# EAGLE board STM32F446RE_subcircuitpre (EAGLE 8.6.3)
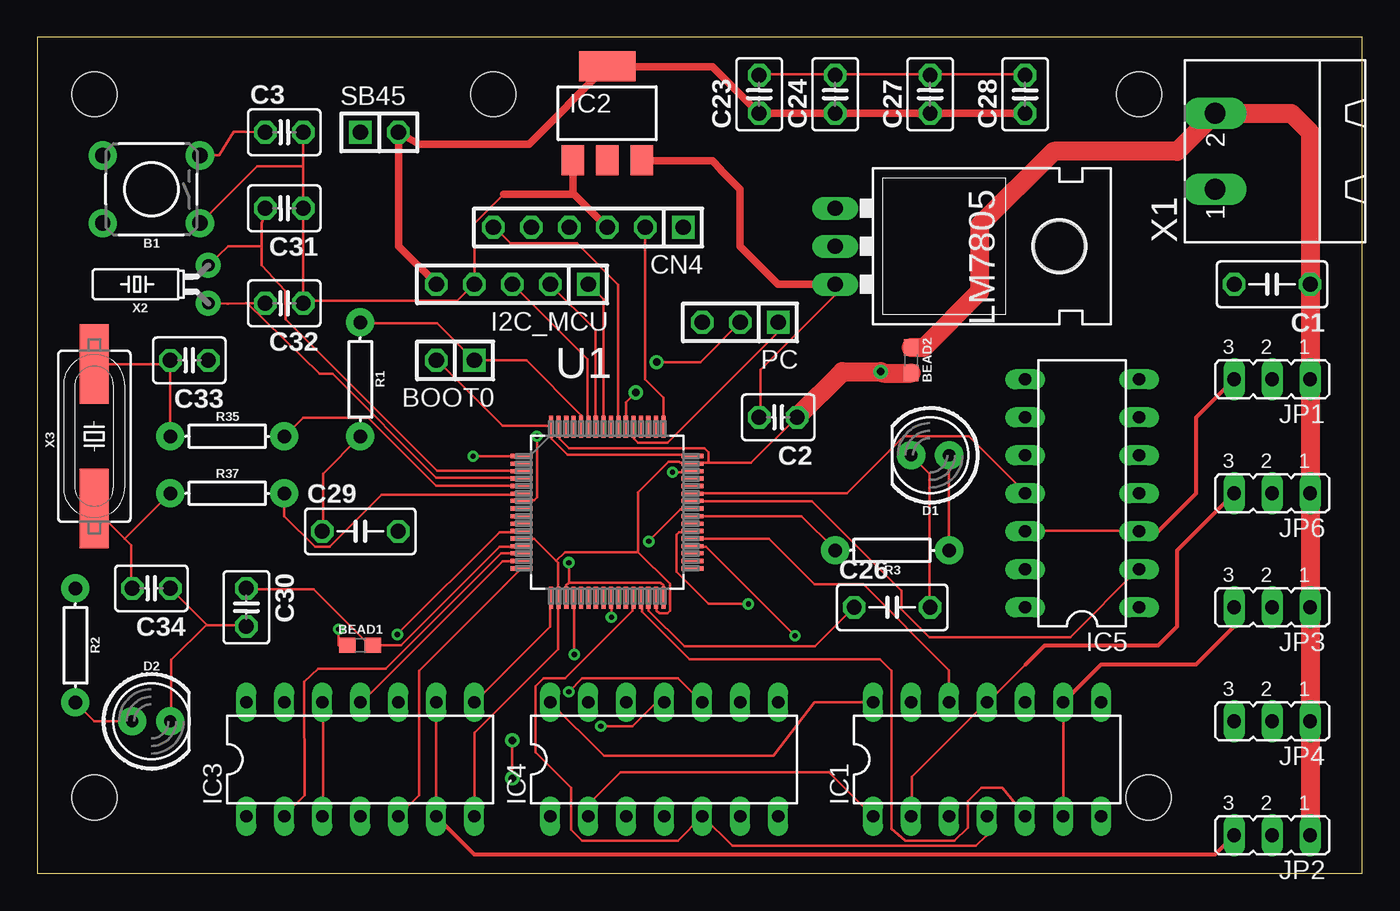
[diagram p0: board, top side]
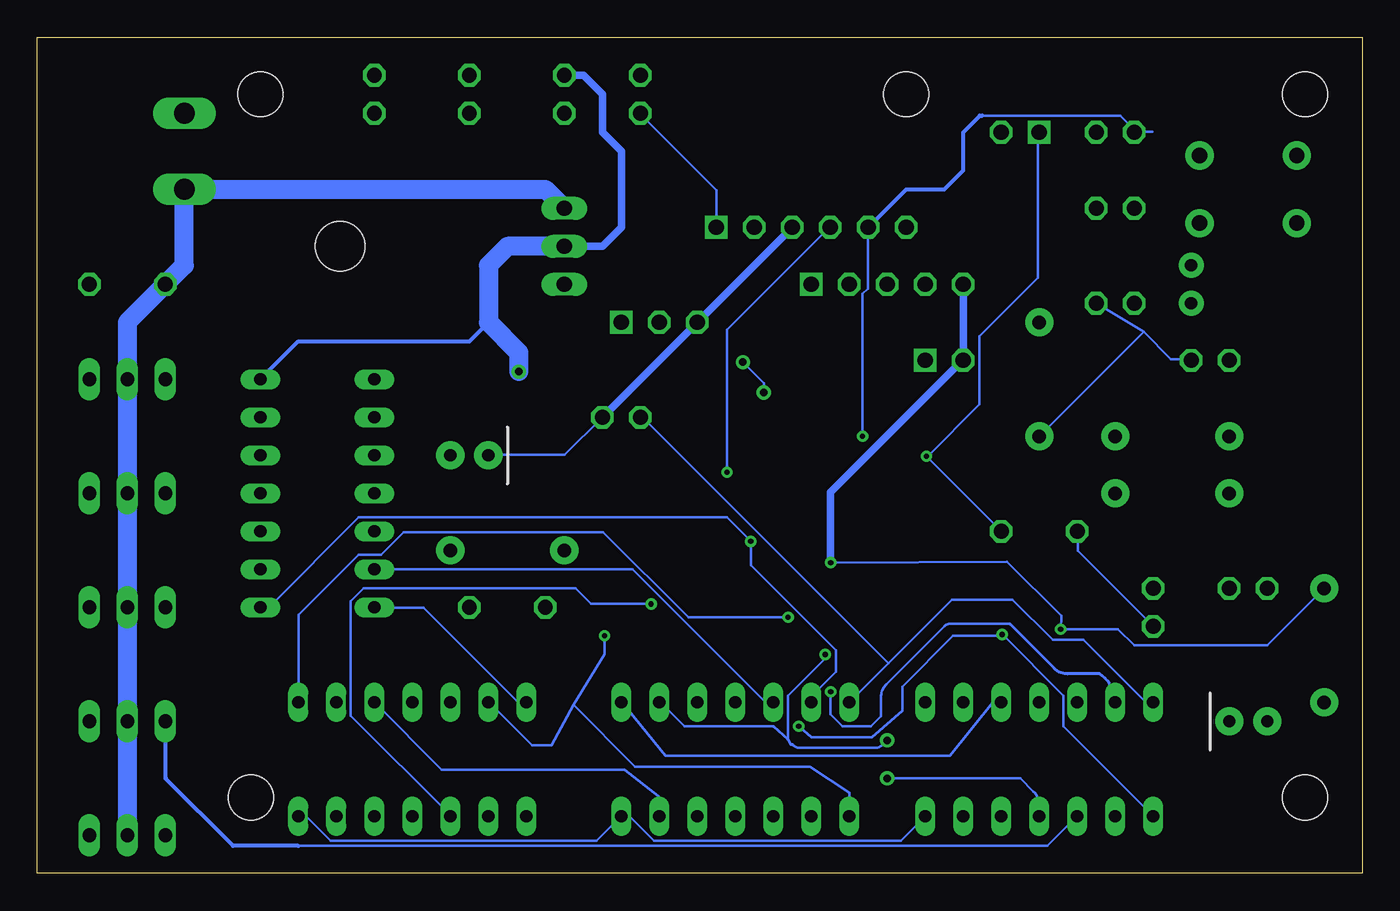
[diagram p1: board, bottom side, seen from below]

Size 88.57 x 55.87 mm. Coordinates in mm from the lower left corner, seen from the top.
Outline: 0,0 88.57,0 88.57,55.87 0,55.87 0,0
Copper layers (1*16): Top 0.035mm / dielectric 1.5mm / Bottom 0.035mm
Design rules "default *": minimum track width 7mil, minimum drill 0.35mm, track to track 7mil, track to pad 7mil, pad to pad 7mil, via to via 7mil, smd to smd 7mil, copper to edge 40mil, drill to drill 6mil, minimum pad ring 10mil, minimum via ring 8mil, stop-mask expansion 4mil, vias tented up to drill 0mil, thermal gap 10mil
Net classes: 0 default: width 0.178 mm, drill 0.178 mm, clearance 0.178 mm; 1 servo: width 0.254 mm, drill 0.254 mm, clearance 0.254 mm
Holes 3 mm at 74.3,5.08 3.81,5.08 3.81,52.07 73.66,52.07 30.48,52.07

## Footprints (pad centres in the part's own frame; a part is rotated, then mirrored left to right if it is on the bottom)
TACTILE_SWITCH_PTH_6.0MM = drill 1.016 pad 1.88: 1 -3.251,2.261; 2 3.251,2.261; 3 -3.251,-2.261; 4 3.251,-2.261
0603 = smd 1.1 x 1: 1 -0.85,0; 2 0.85,0
1X02 = drill 1.016 square: 1 -1.27,0 | drill 1.016 octagon: 2 1.27,0
C050-030-075 = drill 1 octagon: 1 -2.54,0; 2 2.54,0
C025-030X050 = drill 1 octagon: 1 -1.27,0; 2 1.27,0
1X06 = drill 1.016 square: 1 -6.35,0 | drill 1.016 octagon: 2 -3.81,0; 3 -1.27,0; 4 1.27,0; 5 3.81,0; 6 6.35,0
LED_5MM = drill 0.813 pad 1.88: A -1.27,0; K 1.27,0
1X05 = drill 1.016 square: 1 -5.08,0 | drill 1.016 octagon: 2 -2.54,0; 3 0,0; 4 2.54,0; 5 5.08,0
DIL14 = drill 0.813 long: 1 -7.62,-3.81; 2 -5.08,-3.81; 3 -2.54,-3.81; 4 0,-3.81; 5 2.54,-3.81; 6 5.08,-3.81; 7 7.62,-3.81; 8 7.62,3.81; 9 5.08,3.81; 10 2.54,3.81; 11 0,3.81; 12 -2.54,3.81; 13 -5.08,3.81; 14 -7.62,3.81
SOT223 = smd 1.5 x 2: 1 -2.3,-3.15; 2 0,-3.15; 3 2.3,-3.15 | smd 3.8 x 2: 4 0,3.15
JP2 = drill 0.914 long: 1 -2.54,0; 2 0,0; 3 2.54,0
TO-220-ALT = drill 1.016 long: GND 0,-3.81; IN -2.54,-3.81; OUT 2.54,-3.81 | hole 3.302: 0,11.176
1X03 = drill 1.016 square: 1 -2.54,0 | drill 1.016 octagon: 2 0,0; 3 2.54,0
AXIAL-0.3 = drill 0.9 pad 1.88: P$1 -3.81,0; P$2 3.81,0
QFP50P1200X1200X160-64N = smd 1.473 x 0.279: 1 -5.715,3.759; 2 -5.715,3.251; 3 -5.715,2.743; 4 -5.715,2.261; 5 -5.715,1.753; 6 -5.715,1.245; 7 -5.715,0.762; 8 -5.715,0.254; 9 -5.715,-0.254; 10 -5.715,-0.762; 11 -5.715,-1.245; 12 -5.715,-1.753; 13 -5.715,-2.261; 14 -5.715,-2.743; 15 -5.715,-3.251; 16 -5.715,-3.759; 33 5.715,-3.759; 34 5.715,-3.251; 35 5.715,-2.743; 36 5.715,-2.261; 37 5.715,-1.753; 38 5.715,-1.245; 39 5.715,-0.762; 40 5.715,-0.254; 41 5.715,0.254; 42 5.715,0.762; 43 5.715,1.245; 44 5.715,1.753; 45 5.715,2.261; 46 5.715,2.743; 47 5.715,3.251; 48 5.715,3.759 | smd 0.279 x 1.473: 17 -3.759,-5.715; 18 -3.251,-5.715; 19 -2.743,-5.715; 20 -2.261,-5.715; 21 -1.753,-5.715; 22 -1.245,-5.715; 23 -0.762,-5.715; 24 -0.254,-5.715; 25 0.254,-5.715; 26 0.762,-5.715; 27 1.245,-5.715; 28 1.753,-5.715; 29 2.261,-5.715; 30 2.743,-5.715; 31 3.251,-5.715; 32 3.759,-5.715; 49 3.759,5.715; 50 3.251,5.715; 51 2.743,5.715; 52 2.261,5.715; 53 1.753,5.715; 54 1.245,5.715; 55 0.762,5.715; 56 0.254,5.715; 57 -0.254,5.715; 58 -0.762,5.715; 59 -1.245,5.715; 60 -1.753,5.715; 61 -2.261,5.715; 62 -2.743,5.715; 63 -3.251,5.715; 64 -3.759,5.715
MSTBA2 = drill 1.397 long: 1 -2.54,5.08; 2 2.54,5.08
CRYSTAL-PTH-2X6-CYL = drill 0.813 pad 1.676: 1 -1.27,0; 2 1.27,0
HC49UP = smd 5.334 x 1.93: 1 -4.826,0; 2 4.826,0

## Placement (x,y rotation side)
B1  6MM(momentary)  [TACTILE_SWITCH_PTH_6.0MM]  7.62,45.72 180 top
BEAD1  30Ω/1.8A  [0603]  21.59,15.24 0 top
BEAD2  30Ω/1.8A  [0603]  58.42,34.29 270 top
BOOT0  [1X02]  27.94,34.29 180 top
C1  1uF  [C050-030-075]  82.55,39.37 180 top
C2  100nF  [C025-030X050]  49.53,30.48 180 top
C3  100nF  [C025-030X050]  16.51,49.53 0 top
C23  100nF  [C025-030X050]  48.26,52.07 90 top
C24  100nF  [C025-030X050]  53.34,52.07 90 top
C26  4.7uF  [C050-030-075]  57.15,17.78 0 top
C27  100nF  [C025-030X050]  59.69,52.07 90 top
C28  100nF  [C025-030X050]  66.04,52.07 90 top
C29  1uF  [C050-030-075]  21.59,22.86 0 top
C30  100nF  [C025-030X050]  13.97,17.78 270 top
C31  4.3pF  [C025-030X050]  16.51,44.45 180 top
C32  4.3pF  [C025-030X050]  16.51,38.1 180 top
C33  20pF  [C025-030X050]  10.16,34.29 180 top
C34  20pF  [C025-030X050]  7.62,19.05 180 top
CN4  [1X06]  36.83,43.18 180 top
D1  [LED_5MM]  59.69,27.94 180 top
D2  [LED_5MM]  7.62,10.16 0 top
I2C_MCU  [1X05]  31.75,39.37 180 top
IC1  74AC126N  [DIL14]  63.5,7.62 0 top
IC2  LD117AS33TR  [SOT223]  38.1,50.8 0 top
IC3  74AC126N  [DIL14]  21.59,7.62 0 top
IC4  74HC04N  [DIL14]  41.91,7.62 0 top
IC5  74AC126N  [DIL14]  69.85,25.4 90 top
JP1  [JP2]  82.55,33.02 180 top
JP2  [JP2]  82.55,2.54 180 top
JP3  [JP2]  82.55,17.78 180 top
JP4  [JP2]  82.55,10.16 180 top
JP6  [JP2]  82.55,25.4 180 top
LM7805  [TO-220-ALT]  57.15,41.91 270 top
PC  [1X03]  46.99,36.83 180 top
R1  10k  [AXIAL-0.3]  21.59,33.02 270 top
R2  1k  [AXIAL-0.3]  2.54,15.24 270 top
R3  1k  [AXIAL-0.3]  57.15,21.59 180 top
R35  1k  [AXIAL-0.3]  12.7,29.21 0 top
R37  1k  [AXIAL-0.3]  12.7,25.4 0 top
SB45  [1X02]  22.86,49.53 0 top
U1  STM32F446RE  [QFP50P1200X1200X160-64N]  38.1,24.13 0 top
X1  MSTBA2  [MSTBA2]  83.82,48.26 90 top
X2  32.768kHz  [CRYSTAL-PTH-2X6-CYL]  11.43,39.37 90 top
X3  8MHz  [HC49UP]  3.81,29.21 90 top

## Library data of the parts
B1 = SparkFun-Switches; PROD_ID: SWCH-08441; SF_SKU: COM-00097
BEAD1 BEAD2 = SparkFun-Coils; PROD_ID: NDUC-13805
BOOT0 CN4 I2C_MCU PC SB45 = pinhead
C1-C3 C23 C24 C26-C34 = ee2parts
D1 D2 = SparkFun-LED
IC1 IC3-IC5 = 74xx-eu
IC2 = v-reg
JP1-JP4 JP6 = jumper
LM7805 = SparkFun-IC-Power; PROD_ID: VREG-08450; SF_ID: COM-00107
R1 R35 R37 = SparkFun-Resistors; PROD_ID: RES-12183
R2 = SparkFun-Resistors; PROD_ID: RES-12182
R3 = SparkFun-Resistors; PROD_ID: RES-08380
U1 = STM32F446RE
X1 = con-phoenix-508
X2 = SparkFun-Clocks; PROD_ID: XTAL-10112
X3 = SparkFun-Clocks; PROD_ID: XTAL-11706

## Nets
5V: C2.2 IC1.14 IC2.3 IC3.14 IC4.14 IC5.14 LM7805.OUT
12V [servo]: C1.2 JP1.2 JP2.2 JP3.2 JP4.2 JP6.2 LM7805.IN X1.1
AVDD: BEAD1.2 C30.1 U1.13
BOOT0: BOOT0.1 R1.P$1 U1.60
GND: B1.1 BEAD2.2 C2.1 C3.2 C23.2 C24.2 C26.2 C27.2 C28.2 C29.1 C30.2 C31.1 C32.1 C33.1 C34.1 CN4.3 D1.K D2.K I2C_MCU.4 IC1.7 IC2.1 IC3.7 IC4.7 IC5.7 LM7805.GND PC.3 R1.P$2 U1.12 U1.18 U1.31 U1.47 U1.63
I2C1_SCL: I2C_MCU.2 U1.58
I2C1_SDA: I2C_MCU.3 U1.59
INT: I2C_MCU.1 U1.57
MGND [servo]: BEAD2.1 C1.1 JP1.1 JP2.1 JP3.1 JP4.1 JP6.1 X1.2
N$1: R35.P$2 U1.5
N$2: R37.P$2 U1.6
N$3: IC1.1 IC4.2
N$4: C34.2 R37.P$1 X3.1
N$5: C33.2 R35.P$1 X3.2
N$6: IC1.10 IC4.6
N$7: D2.A R2.P$2
N$8: C31.2 U1.3 X2.2
N$9: C32.2 U1.4 X2.1
N$10: R3.P$2 U1.40
N$11: IC3.13 IC4.10
N$12: D1.A R3.P$1
N$17: IC3.10 IC4.8
N$18: IC4.12 IC5.13
N$20: IC5.3 IC5.12 JP1.3
NRST: B1.3 C3.1 CN4.5 U1.7
OUT1: IC1.2 IC1.11 JP6.3
OUT2: IC3.3 IC3.12 JP4.3
OUT3: IC1.6 IC1.9 JP3.3
OUT4: IC3.6 IC3.9 JP2.3
SWO: CN4.6 U1.55
TCK: CN4.2 U1.49
TMS: CN4.4 U1.46
U1_DIR: IC4.13 IC5.1 U1.41
U2_DIR: IC3.4 IC4.9 U1.20
U3_DIR: IC1.4 IC4.5 U1.28
U4_DIR: IC3.1 IC4.11 U1.11
U6_DIR: IC1.13 IC4.1 U1.36
UART4_RX: IC3.11 U1.15
UART4_TX: IC3.2 U1.14
USART1_RX: IC5.11 U1.43
USART1_TX: IC5.2 U1.42
USART2_RX: IC3.8 U1.17
USART2_TX: IC3.5 U1.16
USART3_RX: IC1.8 U1.25
USART3_TX: IC1.5 U1.29
USART5_RX: PC.2 U1.54
USART5_TX: PC.1 U1.53
USART6_RX: IC1.3 U1.38
USART6_TX: IC1.12 U1.37
VBAT: C29.2 SB45.1 U1.1
VCAP_1: C26.1 U1.30
VDD: BEAD1.1 BOOT0.2 C23.1 C24.1 C27.1 C28.1 CN4.1 I2C_MCU.5 IC2.4 R2.P$1 SB45.2 U1.19 U1.32 U1.48 U1.64

## Tracks (layer width: path | path; a pad name or v marks a point on that pad's centre or on a via)
5V
  Top 0.178: 53.31,39.43 LM7805.OUT 53.31,39.34 53.31,38.63 48.34,33.66 48.34,30.54 C2.2 | IC1.14 51.94,11.43 49.22,7.85 37.87,7.85 IC4.14 | 40.42,47.61 IC2.3
  Top 0.508: LM7805.OUT 49.53,39.37 46.99,41.91 46.99,45.72 45.72,46.99 45.72,47.03 45.14,47.61 40.42,47.61
  Bottom 0.178: IC1.14 56.43,11.43 62.74,17.74 66.03,17.74 IC5.14 | IC3.14 14.46,11.43 18.64,15.61 20.69,15.61 23.38,18.3 27.42,18.3 31.67,14.05 | IC4.14 31.67,14.05 | 31.67,14.05 48.07,30.45 48.25,30.45 C2.2
12V
  Top 0.254: 53.4,44.5 LM7805.IN | 77.41,45.66 X1.1 77.5,45.57 | 79.98,39.42 C1.2
  Bottom 0.254: 80.07,39.33 C1.2 | 82.47,33.02 JP1.2
  Bottom 1.27: JP2.2 JP4.2 JP3.2 JP6.2 JP1.2 82.55,36.83 C1.2 78.74,40.64 X1.1 54.61,45.72 LM7805.IN
AVDD
  Top 0.178: C30.1 14.02,18.99 18.47,18.99 22.2,15.25 22.38,15.25 BEAD1.2 22.47,15.25 24.33,15.25 30.91,21.83 32.33,21.83 U1.13
BOOT0
  Top 0.178: U1.60 36.33,29.92 36.33,30.63 32.69,34.28 29.22,34.28 BOOT0.1 26.73,36.77 21.67,36.77 R1.P$1
GND  (via drill 0.5 pad 0.95)
  Top 0.178: C3.2 17.78,47.26 | 17.78,47.26 C31.1 17.78,38.28 | 17.78,47.26 14.71,47.26 B1.1 | C29.1 19.09,22.9 19.09,26.72 21.58,29.21 R1.P$2 | C34.1 11.31,16.63 | 11.31,16.63 11.35,16.59 13.93,16.59 C30.2 | 11.31,16.63 8.95,14.28 8.95,10.17 D2.K | 34.69,20.9 34.82,20.77 34.82,18.45 U1.18 34.82,18.36 34.82,14.99 29.22,9.38 29.22,3.87 IC3.7 | 34.69,20.9 33.22,22.36 32.42,22.36 U1.12 | 40.16,21.48 42.29,19.34 42.29,17.56 42.11,17.39 41.58,17.39 41.4,17.56 41.4,18.36 U1.31 | 40.16,21.48 35.27,21.48 34.69,20.9 | 35.8,45.48 35.85,45.43 35.8,45.39 | 35.8,47.61 IC2.1 | 31.18,45.39 29.22,43.43 29.22,39.43 I2C_MCU.4 29.13,39.34 28.07,38.28 17.78,38.28 | C26.2 59.63,17.83 59.63,26.72 58.47,27.88 D1.K | 50.82,30.54 C2.1 50.74,30.45 47.71,27.43 44.87,27.43 | 44.87,27.43 43.89,27.43 U1.47 43.8,27.43 43,27.43 42.91,27.52 42.2,27.52 40.16,25.48 40.16,21.48 | 44.87,27.43 44.87,28.14 44.6,28.41 35.53,28.41 34.91,29.03 34.91,29.83 U1.63 | 17.78,38.28 C32.1 | C28.2 66.03,53.39 59.71,53.39 C27.2 59.63,53.39 53.4,53.39 C24.2 53.31,53.39 48.34,53.39 C23.2 | 53.4,41.57 53.4,41.83 LM7805.GND | 73.58,33.03 IC5.7
  Top 0.508: 35.8,45.48 35.8,47.61 | CN4.3 35.85,45.43 | 35.8,45.39 31.18,45.39
  Top 1.27: 50.82,30.54 53.81,33.53 v56.39,33.53 arc45 56.6,33.44 BEAD2.2
  Bottom 0.178: C32.1 14.6,36.19 | 14.6,36.19 12.78,34.37 11.44,34.37 C33.1 | C29.1 19,22.81 19,21.56 14.02,16.59 C30.2 | 14.6,36.19 21.58,29.21 R1.P$2 | IC3.7 29.22,3.78 30.82,2.18 47.36,2.18 48.96,3.78 49.49,3.78 IC4.7 49.58,3.78 51.18,2.18 68.96,2.18 70.56,3.78 71.09,3.78 IC1.7 | C2.1 53.31,27.96 58.38,27.96 D1.K
  Bottom 0.254: IC5.7 71.12,35.56 59.69,35.56 58.42,36.83
  Bottom 0.508: C2.1 PC.3 CN4.3 | LM7805.GND 50.8,41.91 49.53,43.18 49.53,48.26 50.8,49.53 50.8,52.07 52.07,53.34 C24.2
  Bottom 1.27: LM7805.GND 57.15,41.91 58.42,40.64 58.42,36.83 56.39,34.8 v56.39,33.53
I2C1_SCL
  Top 0.178: U1.58 37.31,29.92 37.31,36.32 34.29,39.34 I2C_MCU.2
I2C1_SDA
  Top 0.178: U1.59 36.78,29.92 36.78,34.37 31.8,39.34 I2C_MCU.3
INT
  Top 0.178: U1.57 37.85,38.37 36.87,39.34 I2C_MCU.1
MGND
  Top 0.254: 85.14,2.62 JP2.1 | 85.14,10.08 JP4.1 85.14,10.26 | 85.14,17.73 JP3.1 85.14,17.82 | 85.05,33.02 JP1.1 85.14,32.93 | 85.14,25.46 JP6.1 85.14,25.29 | 85.05,39.33 C1.1 84.96,39.42 | 77.5,50.72 X1.2
  Top 1.27: JP2.1 JP4.1 JP3.1 JP6.1 JP1.1 C1.1 85.09,49.53 83.82,50.8 X1.2 76.2,48.26 67.95,48.26 62.99,43.31 62.99,38.86 59.27,35.14 BEAD2.1
N$1
  Top 0.178: R35.P$2 17.75,30.45 22.11,30.45 26.64,25.92 32.33,25.92 U1.5
N$2
  Top 0.178: R37.P$2 16.51,23.88 18.55,21.83 19.53,21.83 23,25.3 32.33,25.3 U1.6
N$3
  Top 0.178: IC4.2 36.87,3.87 36.89,4.63 39,6.74 52.93,6.74 55.8,3.87 IC1.1
N$4
  Top 0.178: 5.84,22.36 3.89,24.32 X3.1 | 5.84,22.36 6.29,21.92 6.29,19.07 C34.2 | 5.84,22.36 8.87,25.39 R37.P$1
N$5
  Top 0.178: 8.87,34.01 8.87,29.21 R35.P$1 | 8.87,34.01 8.87,34.28 C33.2 8.87,34.01 | 8.87,34.01 3.89,34.01 X3.2
N$6
  Bottom 0.178: IC4.6 47,3.87 47.03,5.14 49.33,6.93 61.53,6.93 66.03,11.43 IC1.10
N$7
  Top 0.178: R2.P$2 3.8,10.17 5.02,10.17 D2.A
N$8
  Top 0.178: 15,41.92 15,43.43 15.29,44.41 C31.2 | 15,41.92 15,40.64 16.57,38.94 16.6,37.03 26.73,26.9 32.33,26.9 U1.3 | 15,41.92 12.76,41.92 X2.2
N$9
  Top 0.178: 14.02,38.1 18.87,33.38 19.72,33.38 26.64,26.45 32.33,26.45 U1.4 | X2.1 12.76,38.07 12.69,38.07 13.93,38.1 14.02,38.1 | 14.02,38.1 C32.2
N$10
  Top 0.178: U1.40 51.09,23.88 53.31,21.65 R3.P$2
N$11  (via drill 0.35)
  Top 0.178: v35.53,12.14 36.42,13.03 42.82,13.03 44.42,11.43 IC4.10
  Bottom 0.178: v35.53,12.14 35.53,10.63 34.73,9.83 32.83,9.83 32.17,10.49 32.17,11.76 arc45 31.8,12.65 27.94,16.51 arc45 27.54,16.67 23.56,16.67
  Bottom 0.203: IC3.13 arc-52 17.53,13.33 19.69,13.33 arc45 20.59,13.71 23.56,16.67
N$12
  Top 0.178: D1.A R3.P$1
N$17
  Bottom 0.178: IC3.10 24.69,11.43 27.56,7.87 46.57,7.87 49.49,11.43 IC4.8
N$18
  Bottom 0.178: IC4.12 39.89,11.43 48.78,20.32 IC5.13
N$20
  Top 0.178: IC5.12 66.12,22.9 73.58,22.9 IC5.3 73.67,22.9 | 79.98,33.02 JP1.3
  Top 0.254: IC5.3 74.93,22.86 77.47,25.4 77.47,30.48 JP1.3
NRST  (via drill 0.35)
  Top 0.178: C3.1 13.93,49.57 13.12,49.57 12.17,47.98 B1.3 | v33.4,29.21 33.4,25.12 33.22,24.94 32.42,24.94 U1.7
  Bottom 0.178: v33.4,29.21 33.4,38.72 33.04,39.08 33.04,43.17 CN4.5 32.96,43.26 | 25.58,50.63 25.4,50.63 16.15,50.63 15.09,49.57 14.02,49.57 C3.1
  Bottom 0.254: CN4.5 30.48,45.72 27.94,45.72 26.67,46.99 26.67,49.53 25.57,50.63 25.4,50.63
OUT1
  Top 0.178: IC1.2 58.47,3.87 58.47,6.45 63.45,11.43 IC1.11 63.54,11.43 66.06,13.95 66.38,14.28 | 79.45,25.38 79.98,25.38 JP6.3
  Top 0.254: 66.06,13.95 67.35,15.24 74.93,15.24 76.2,16.51 76.2,21.59 79.98,25.38
OUT2
  Top 0.178: IC3.3 19.09,3.87 19.09,11.43 IC3.12
  Bottom 0.178: 71.18,1.83 71.12,1.83 21.04,1.83 19.09,3.78 IC3.3 | 79.98,10.08 JP4.3
  Bottom 0.254: 71.12,1.83 75.49,1.83 80.01,6.35 79.98,6.37 79.98,10.08
OUT3
  Top 0.178: IC1.6 68.61,3.87 68.61,11.43 IC1.9 | 79.98,17.73 JP3.3
  Top 0.254: IC1.9 71.12,13.97 77.47,13.97 80.01,16.51 JP3.3
OUT4
  Top 0.178: IC3.9 26.64,11.43 26.64,3.87 IC3.6 26.73,3.78 | 79.98,2.62 JP2.3
  Top 0.254: IC3.6 29.21,1.27 78.74,1.27 JP2.3
SWO
  Top 0.178: U1.55 38.82,29.92 38.82,39.34 36.07,42.1 31.62,42.1 30.56,43.17 CN4.6
TCK
  Top 0.152: U1.49 41.86,31.8 40.64,33.02 40.64,43.12 40.69,43.17
  Top 0.178: 41.85,29.92 U1.49 | 40.69,43.17 CN4.2
TMS  (via drill 0.35)
  Top 0.178: v42.47,26.81 43.8,26.81 U1.46
  Bottom 0.178: v42.47,26.81 42.47,36.32 35.62,43.17 CN4.4
U1_DIR  (via drill 0.35)
  Top 0.178: v40.87,22.19 43,24.32 43.8,24.32 U1.41
  Bottom 0.178: IC4.13 36.78,11.43 36.78,11.87 35.18,13.47 35.18,14.9 40.87,20.59 v40.87,22.19 42.47,23.79 67.09,23.79 73.05,17.83 73.58,17.83 IC5.1
U2_DIR  (via drill 0.35, 0.5 pad 0.95)
  Top 0.178: v35.89,14.63 35.89,18.36 U1.20 | v31.75,6.35 v31.75,8.89
  Bottom 0.178: v35.89,14.63 35.89,14.36 38.38,11.87 38.38,10.36 38.4,8.95 38.19,8.61 38.1,8.61 arc-45 37.54,8.38 32.51,8.38 arc-43 v31.75,8.89 | 39.37,9.83 45.31,9.83 46.91,11.43 IC4.9 | IC3.4 21.59,4.55 arc-45 21.96,5.45 22.86,6.35 v31.75,6.35
  Bottom 0.203: 39.37,9.83 38.4,8.95
U3_DIR
  Top 0.178: U1.28 39.8,18.36 39.8,17.56 35.27,13.03 33.84,13.03 33.31,12.5 33.31,8.08 35.69,5.71 35.69,2.92 36.42,2.18 42.82,2.18 IC4.5 44.51,3.78 46.47,1.83 62.76,1.83 63.45,2.51 IC1.4
U4_DIR  (via drill 0.35)
  Top 0.178: v24.07,15.96 30.91,22.81 32.33,22.81 U1.11 | IC4.11 41.4,11.43 39.8,9.83 v37.67,9.83
  Bottom 0.178: IC3.1 14.02,3.87 19.98,9.83 19.98,11.87 v24.07,15.96 24.07,15.87 27.36,15.87 30.75,12.48 30.75,10.87 32.78,9.09 36.82,9.09 37.59,9.78 v37.67,9.83
U6_DIR  (via drill 0.35)
  Top 0.178: v50.65,15.87 44.69,21.83 43.89,21.83 U1.36
  Bottom 0.178: v50.65,15.87 50.65,14.63 52.74,11.27 | 52.74,11.27 54.18,8.56 55.51,8.56 58.38,11.43 IC1.13 | 52.74,11.27 48.6,7.14 36.91,7.14 34.28,5.4 34.29,3.87 IC4.1
UART4_RX
  Top 0.178: U1.15 32.33,20.85 31.09,20.85 21.67,11.43 IC3.11
UART4_TX
  Top 0.178: U1.14 31,21.39 23.28,13.67 18.77,13.67 17.84,12.79 17.87,5.23 16.51,3.87 IC3.2
USART1_RX
  Top 0.178: U1.43 43.89,25.39 54.11,25.39 57.94,29.21 62.29,29.21 66.03,25.48 IC5.11
USART1_TX
  Top 0.178: U1.42 43.89,24.85 51.8,24.85 57.76,18.9 57.78,17.65 59.65,15.79 69.05,15.79 73.58,20.32 IC5.2
USART2_RX
  Top 0.178: U1.17 34.29,18.36 34.29,16.5 29.22,11.43 IC3.8
USART2_TX
  Top 0.178: U1.16 32.33,20.32 32.33,20.34 25.51,13.53 25.51,5.23 24.16,3.87 IC3.5
USART3_RX  (via drill 0.35)
  Top 0.178: v38.38,17.12 38.38,18.36 U1.25
  Bottom 0.178: v38.38,17.12 45.05,17.12 50.74,22.81 64.07,22.81 65.58,21.3 67.09,21.3 71.09,17.3 71.09,11.43 IC1.8
USART3_TX
  Top 0.178: U1.29 40.42,18.36 40.42,17.48 43.6,14.3 56.34,14.3 57.11,13.53 57.11,2.97 58.03,2.18 61.32,2.18 62.23,3.05 62.23,4.83 63.12,5.71 64.52,5.71 66.03,3.87 IC1.5
USART5_RX  (via drill 0.5 pad 0.95)
  Top 0.152: PC.2 44.32,34.16 v41.4,34.16 | v40,32.13 39.34,31.47 U1.54
  Top 0.178: 39.36,29.92 U1.54 | 46.91,36.85 PC.2
  Bottom 0.152: v41.4,34.16 40,32.77 v40,32.13
USART5_TX
  Top 0.178: U1.53 39.89,29.83 39.89,29.03 40.16,28.77 42.11,28.77 49.49,36.14 49.49,36.77 PC.1
USART6_RX  (via drill 0.35)
  Top 0.178: v47.54,18.01 44.87,18.01 42.73,20.14 42.73,22.63 42.91,22.81 43.8,22.81 U1.38
  Bottom 0.178: v47.54,18.01 51.56,18.03 52.58,19.05 66.75,19.06 67.63,18.19 67.63,10.54 60.96,3.87 IC1.3
USART6_TX
  Top 0.178: IC1.12 60.96,13.58 55.22,19.32 51.97,19.32 48.92,22.36 43.89,22.36 U1.37
VBAT  (via drill 0.35)
  Top 0.178: v29.13,27.88 32.33,27.88 U1.1
  Bottom 0.178: C29.2 24.16,22.9 v29.13,27.88 29.05,27.88 25.58,31.34 25.58,35.9 21.67,39.81 21.67,49.48 SB45.1
VCAP_1
  Top 0.178: U1.30 40.87,18.36 40.87,17.56 43.27,15.16 51.98,15.16 54.56,17.74 C26.1
VDD  (via drill 0.35)
  Top 0.178: 48.34,50.81 C23.1 | 53.31,50.81 C24.1 53.4,50.81 | 59.63,50.81 C27.1 59.71,50.81 | 66.03,50.81 C28.1 | 38.11,53.92 IC2.4 38.02,53.92 | BEAD1.1 20.69,15.25 20.16,15.25 v20.16,16.32 | U1.19 35.36,19.25 35.53,19.43 | 35.53,19.43 41.67,19.43 41.85,19.25 41.85,18.45 U1.32 | BOOT0.2 26.73,34.28 31.09,29.92 34.29,29.92 U1.64 34.38,29.83 34.38,29.03 35.45,27.96 43.8,27.96 U1.48 | 24.16,49.48 SB45.2 | 26.64,39.43 I2C_MCU.5 | v35.53,20.77 35.53,19.43
  Top 0.508: 53.31,50.81 48.34,50.81 | 53.4,50.81 59.63,50.81 | 59.71,50.81 66.03,50.81 | 38.11,53.92 45.14,53.92 C23.1 | 24.16,49.48 24.16,41.92 26.64,39.43 | 38.02,53.92 32.88,48.72 25.51,48.72 SB45.2
  Bottom 0.152: v20.16,16.32 16.32,16.32 15.24,15.24 6.35,15.24 R2.P$1
  Bottom 0.178: CN4.1 43.18,45.66 48.25,50.72 C23.1 | 26.64,39.34 I2C_MCU.5 | 26.64,34.37 BOOT0.2 26.73,34.28 | v20.16,16.32 20.1,17.21 23.75,20.83 v35.53,20.77
  Bottom 0.508: 26.64,34.37 26.64,39.34 | v35.53,20.77 35.53,25.48 26.73,34.28